# Altium PCB linkit-v4-0.1.PcbDoc (part 3 of 3)
Units mm, origin at the board's own origin, x right, y up, seen from the top; angles counter-clockwise.
Board outline 70 x 35 mm, 4 copper layers (Top Layer, Int1 (GND), Int2 (PWR), Bottom Layer), stack 1.369 mm thick; 193 components, 157 nets, 777 pads, 76 vias.
Unrouted connection lines stored in the file: 373.
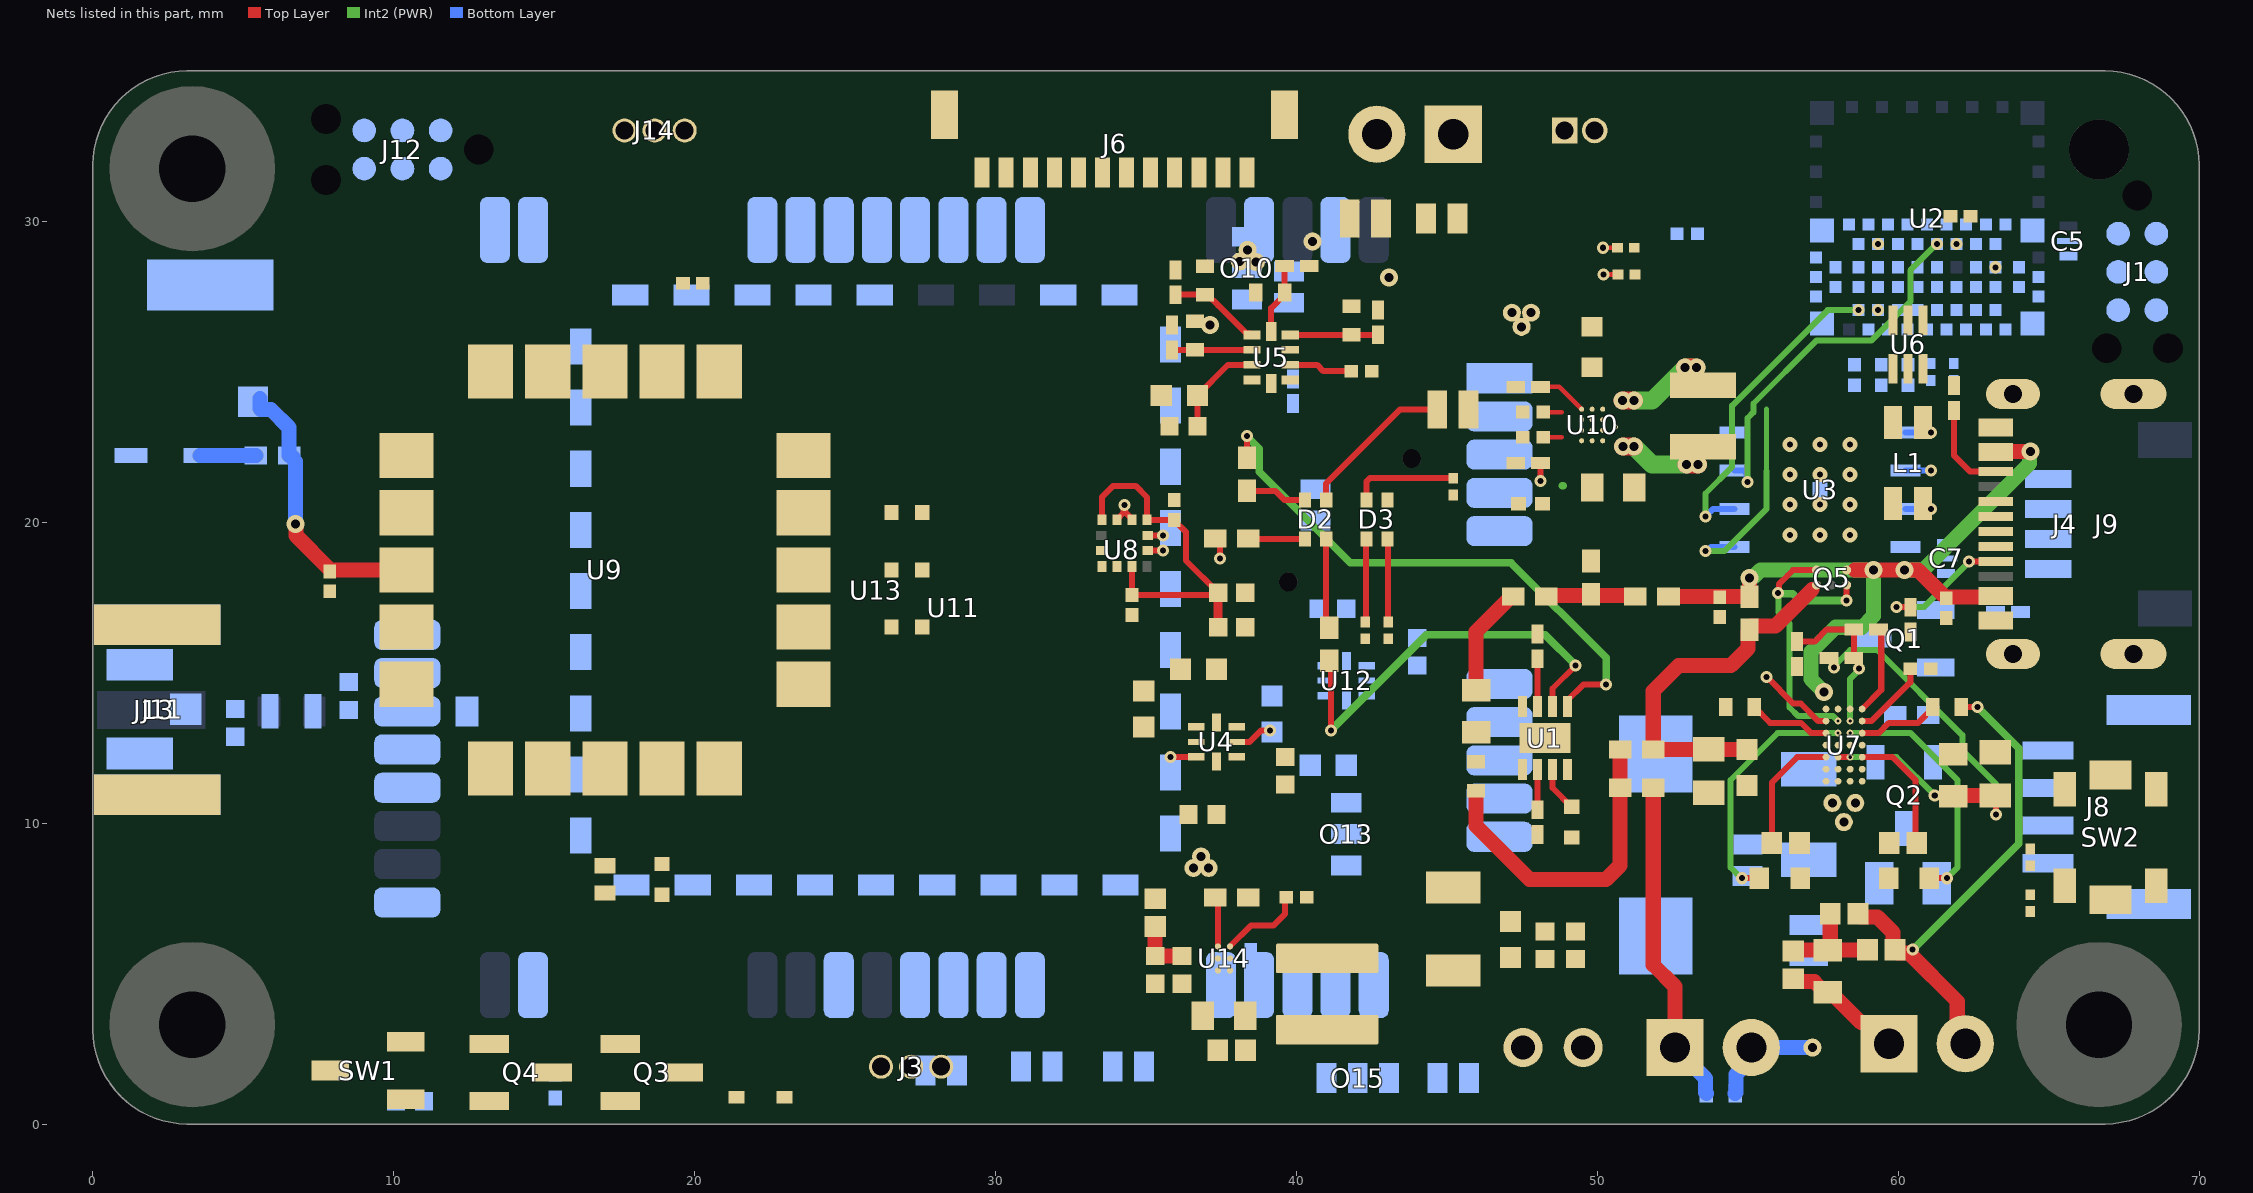
[diagram p3: the nets of this part, all layers, seen from the top]

## Part data (continued)
R50: "Thick Film Resistors - SMD 1/16watt 49.9Kohms 1%", Manufacturer_Name=Vishay, Mouser Part Number=71-CRCW0402-49.9K-E3, Arrow Part Number=CRCW040249K9FKED, Arrow Price/Stock=https://www.arrow.com/en/products/crcw040249k9fked/vishay?region=nac, Datasheet Link=http://www.vishay.com/docs/20035/dcrcwe3.pdf, Height=0.4mm, Manufacturer_Part_Number=CRCW040249K9FKED, Mouser Price/Stock=https://www.mouser.co.uk/ProductDetail/Vishay-Dale/CRCW040249K9FKED?qs=hAuyw6LW%252BLhwjtjsHx%2FGDQ%3D%3D
R52 R53 R54 R55 R56: "Thick Film Resistors - SMD CRCW 402 jumper", Manufacturer_Name=Vishay, Mouser Part Number=71-CRCW04020000Z0EEH, Arrow Part Number=CRCW04020000Z0EEHP, Arrow Price/Stock=https://www.arrow.com/en/products/crcw04020000z0eehp/vishay?utm_currency=USD&region=nac, Datasheet Link=http://www.vishay.com/docs/20035/dcrcwe3.pdf, Height=0.4mm, Manufacturer_Part_Number=CRCW04020000Z0EEHP, Mouser Price/Stock=https://www.mouser.co.uk/ProductDetail/Vishay-Dale/CRCW04020000Z0EEHP?qs=Imq1NPwxi74NTc567q7flQ%3D%3D
SW1: "Board Mount Hall Effect/Magnetic Sensors Integrated Digital Omnipolar, TMR, High Sensitivity Magnetic Switch, SOT23 Package, Ind Temp, 2Hz", Manufacturer_Name="Allegro MicroSystems", Mouser Part Number=462-CT8132BV-IS3, Datasheet Link=https://www.mouser.fr/datasheet/2/1115/Allegro_DS_CT813x_Datasheet_GS_FINAL_R2_v2-3441103.pdf, Height=1.4mm, Manufacturer_Part_Number=CT8132BV-IS3, Mouser Price/Stock=https://www.mouser.fr/ProductDetail/Allegro-MicroSystems/CT8132BV-IS3?qs=GBLSl2Akirsc7cUAudCqXg%3D%3D
SW2: "SW SPST PB 50MA 12V SMT CK variant", Manufacturer=C&K, Manufacturers Part Number="PTS820J2xM SMTR LFS", Supplier Part Number 1=611-PTS820J25MSMTR, Distributor 1=EBV, Distributor 2="Future Electronics", Supplier 1=Mouser, Supplier 2=Digi-Key, Supplier Part Number 2=CKN10505CT-ND
U1: "Battery Management 800-mA linear batter y charger for one-ce", Manufacturer_Name="Texas Instruments", Mouser Part Number=595-BQ25176MDSGR, Arrow Part Number=BQ25176MDSGR, Arrow Price/Stock=https://www.arrow.com/en/products/bq25176mdsgr/texas-instruments?region=nac, Datasheet Link=https://www.ti.com/lit/gpn/bq25176m, Height=0.8mm, Manufacturer_Part_Number=BQ25176MDSGR, Mouser Price/Stock=https://www.mouser.co.uk/ProductDetail/Texas-Instruments/BQ25176MDSGR?qs=Y0Uzf4wQF3nVhcdITj52nA%3D%3D
U2: "IC ISP Smart Bluetooth Module", Manufacturer=InsightSIP, Manufacturers Part Number=ISP1807-LR-ST, Temp Max=85, Temp Min=-40, Supplier 1=Rutronik, Supplier 2=Mouser, Supplier Part Number 1=ISP1807-LR-ST, Supplier Part Number 2=359-ISP1807-LR-ST, Supplier Unit Price 1=8.5
U3: "IC MEM SERIAL NOR FLASH QSPI 128Mb/16MB 3.6V 166MHz WSON8 6X5", Manufacturer=ISSI, Supplier Part Number 1=2901145, Temp Max=105, Temp Min=-40, Distributor 1=EBV, Distributor 2="Future Electronics", Manufacturers Part Number=IS25LP128F-JKLE, Supplier 1=Farnell, Supplier 2=Mouser, Supplier Part Number 2=870-IS25LP128FJKLETR
U4 U12: "Power Switch ICs - Power Distribution Low Input VTG Dual L oad Switch", Manufacturer_Name="Texas Instruments", Mouser Part Number=595-TPS22960RSER, Arrow Part Number=TPS22960RSER, Arrow Price/Stock=https://www.arrow.com/en/products/tps22960rser/texas-instruments?region=nac, Datasheet Link=https://www.ti.com/lit/ds/symlink/tps22960.pdf?ts=1638681846865&ref_url=https%253A%252F%252Fwww.google.com%252F, Height=0.6mm, Manufacturer_Part_Number=TPS22960RSER, Mouser Price/Stock=https://www.mouser.co.uk/ProductDetail/Texas-Instruments/TPS22960RSER?qs=EQxOuqCyzqQpKHLEcq5RSg%3D%3D
U5: "Analog to Digital Converters - ADC 16B ADC w/ Int MUX P GA Comp Osc & Ref A", Manufacturer_Name="Texas Instruments", Mouser Part Number=595-ADS1115IRUGR, Arrow Part Number=ADS1115IRUGR, Arrow Price/Stock=https://www.arrow.com/en/products/ads1115irugr/texas-instruments?utm_currency=USD&region=nac, Datasheet Link=https://www.ti.com/lit/ds/symlink/ads1115.pdf?ts=1601235703022&ref_url=https%253A%252F%252Fwww.ti.com%252Fproduct%252FADS1115%253FkeyMatch%253DADS1115IRUGR%2526tisearch%253DSearch-EN-everything%2526usecase%253DOPN, Height=0.4mm, Manufacturer_Part_Number=ADS1115IRUGR, Mouser Price/Stock=https://www.mouser.co.uk/ProductDetail/Texas-Instruments/ADS1115IRUGR?qs=IK5e5L0zOXhqw%2F8AHSSbuA%3D%3D
U6: "ESD Suppressors / TVS Diodes High Speed Interface Protection Low Cap", Manufacturer_Name=STMicroelectronics, Datasheet Link=https://datasheet.lcsc.com/szlcsc/STMicroelectronics-USBLC6-2P6_C15999.pdf, Height=0.6mm, Manufacturer_Part_Number=USBLC62P6
U7: "Wireless Charging ICs Wireless Pwr Receivr A 595-BQ51003YFPR", Manufacturer_Name="Texas Instruments", Mouser Part Number=595-BQ51003YFPT, Arrow Part Number=BQ51003YFPT, Arrow Price/Stock=https://www.arrow.com/en/products/bq51003yfpt/texas-instruments?region=nac, Datasheet Link=http://www.ti.com/lit/gpn/BQ51003, Height=0.5mm, Manufacturer_Part_Number=BQ51003YFPT, Mouser Price/Stock=https://www.mouser.co.uk/ProductDetail/Texas-Instruments/BQ51003YFPT?qs=QCUnHQQYO1rX6GZ4rUhwCg%3D%3D
U8: "IC AXL Accel/temp SPI/I2C 12LGA", Manufacturer="Bosch Sensortec", Supplier Part Number 1=828-1081-1-ND, Temp Max=85, Temp Min=-40, Manufacturers Part Number=BMA400, Supplier 1=Digi-Key, Supplier 2=Mouser, Supplier Part Number 2=262-BMA400
U9: "GNSS / GPS Modules u-blox M10 GNSS antenna module ROM, TCXO, SAW, LNA LGA, 16x16 mm", Manufacturer_Name=U-Blox, Mouser Part Number=377-SAM-M10Q-00B, Datasheet Link=https://content.u-blox.com/sites/default/files/documents/SAM-M10Q_DataSheet_UBX-22013293.pdf, Height=6.8mm, Manufacturer_Part_Number=SAM-M10Q-00B, Mouser Price/Stock=https://www.mouser.co.uk/ProductDetail/u-blox/SAM-M10Q-00B?qs=vvQtp7zwQdOaA6LplTUKjg%3D%3D
U10: "Switching Voltage Regulators 5.5-V buck-boost con verter with 75-nA op", Manufacturer_Name="Texas Instruments", Mouser Part Number=595-TPS63901YCJR, Arrow Part Number=TPS63901YCJR, Arrow Price/Stock=https://www.arrow.com/en/products/tps63901ycjr/texas-instruments?region=nac, Datasheet Link=https://www.ti.com/lit/ds/symlink/tps63901.pdf?ts=1658737279065&ref_url=https%253A%252F%252Fwww.ti.com%252Fproduct%252FTPS63901%253FkeyMatch%253DTPS63901YCJR%2526tisearch%253Dsearch-everything%2526usecase%253DOPN, Height=0.35mm, Manufacturer_Part_Number=TPS63901YCJR, Mouser Price/Stock=https://www.mouser.co.uk/ProductDetail/Texas-Instruments/TPS63901YCJR?qs=vvQtp7zwQdNZy3FE2e2hqg%3D%3D
U11: "KIM2 Module 48 pins 1.27mm pitch 36.6 x 25.4 x 5mm", Manufacturer=Kineis, Rating=3.3-5V, Tolerance="-30 /  +55°C", BOI="SMD48 36.6x25.4x5mm", DESIG="KIMFLEX Module 48 pins 1.27mm pitch 36.6 x 25.4 x 5mm", K P/N=-, Manufacturer P/N=KIM2, Supplier=Kineis, Supplier P/N=KIMFLEX, VAL=KIM2
U13: "Arribada SMD module Argos comunication with PA GR5504"
U14: "Switching Voltage Regulators 95-nA low IQ 5.5-V b oost converter with INLIMIT (1.9A)", Manufacturer_Name="Texas Instruments", Mouser Part Number=595-TPS612997YBHR, Arrow Part Number=TPS612997YBHR, Arrow Price/Stock=https://www.arrow.com/en/products/tps612997ybhr/texas-instruments?utm_currency=USD&region=nac, Datasheet Link=https://www.ti.com/lit/gpn/tps61299, Height=0.4mm, Manufacturer_Part_Number=TPS612997YBHR, Mouser Price/Stock=https://www.mouser.co.uk/ProductDetail/Texas-Instruments/TPS612997YBHR?qs=mELouGlnn3dLhnQxUdz5hw%3D%3D

## Via types
v1: diameter 0.4, hole 0.2, Top Layer to Int2 (PWR), 28 vias
v2: diameter 0.6, hole 0.3, Top Layer to Int2 (PWR), 16 vias
v3: diameter 0.5, hole 0.2, Top Layer to Bottom Layer, 12 vias
v4: diameter 0.4, hole 0.2, Top Layer to Bottom Layer, 7 vias
v5: diameter 0.4, hole 0.2, Int2 (PWR) to Bottom Layer, 6 vias
v6: diameter 0.226, hole 0.11, Top Layer to Int2 (PWR), 5 vias
v7: diameter 0.169, hole 0.1, Top Layer to Int2 (PWR), 1 vias
v8: diameter 0.6, hole 0.3, Top Layer to Bottom Layer, 1 vias

## Nets (pads, with @x,y where several pads share a name; then routed paths per layer and width w, separated by ;. In a path a pad name is that pad's centre, name@x,y a point inside that pad or via, vN(x,y) a via of type N, cw(c..) or ccw(c..) an arc to the next point about the centre after c; other vN are vias at no path point)
ADC0: O7.2 R27.1
ADC1: O8.2 R30.1
ADC2: J6.5 R32.1
ADC3: J6.12 R51.1
ADC_ALERT_RDY: R28.2 U2.64 U5.2 | length 2.1
  Top Layer w0.2: U5.2@39.797,25.228 40.685,25.228 40.894,25.019 R28.2@41.824,25.019
AGND: C14.2 C15.2 C16.2 C57.2 V?1.1 V?2.1 V?3.1 | length 0.6
  Top Layer w0.2: C57.2@36.626,26.678 36.687,26.617 37.071,26.617 v2(37.132,26.556)
  other v2: 43.076,28.133 40.529,29.337
BAT_AN: C4.2 O5.1 U2.38
BAT_READ_EN: R3.2 R22.2 U2.9
BMA_PWR: C37.2 C38.2 R29.1 R31.2 U8.3 U8.7 U8.10 | length 12.2
  Top Layer w0.2: U8.10@33.54,20.079 33.54,20.843 33.906,21.209 34.654,21.209 35.04,20.823 U8.7@35.04,20.079 C37.2@35.941,20.079 35.941,20.059 36.322,19.678 36.322,18.727 R29.1@37.396,17.653 37.325,17.582 C38.2@34.537,17.582 34.54,17.586 U8.3@34.54,18.529
  Top Layer w0.3: R31.2@37.396,16.51 R29.1@37.396,17.653
BOOT1: C29.2 U7.C4 | length 4.2
  Top Layer w0.2: C29.2@55.798,9.328 55.798,11.348 56.642,12.192 U7.C4@57.601,12.192
BOOT2: C34.2 U7.C1 | length 4.2
  Top Layer w0.2: U7.C1@58.801,12.192 59.817,12.192 60.582,11.427 C34.2@60.582,9.328
CLAMP1: C23.2 U7.E3 | length 8.2
  Top Layer w0.2: v1(54.802,8.168) C23.2@55.388,8.168
  Int2 (PWR) w0.2: v1@54.786,8.168 54.426,8.529 54.426,11.43 55.988,12.992 v6(58.001,12.992)
CLAMP2: C36.2 U7.E2 | length 8.2
  Top Layer w0.2: C36.2@61.029,8.168 v1(61.616,8.168)
  Int2 (PWR) w0.2: v6(58.401,12.992) 60.414,12.992 61.976,11.43 61.976,8.529 v1(61.616,8.168)
COIL-1: C24.1 C28.1 J7.1 | length 4.1
  Top Layer w0.5: C24.1@56.515,4.826 56.61,4.731 57.212,4.731 57.563,4.38 C28.1@57.658,4.38 57.753,4.38 58.766,3.367 58.99,3.367 J7.1@59.69,2.667
COIL-2: C5.1@59.896,5.795 C32.1 C34.1 C35.1 C36.1 J7.2 U7.B1 U7.B2 | length 17
  Top Layer w0.2: C35.1@62.09,13.862 v1(62.631,13.862)
  Top Layer w0.5: C32.1@58.661,6.987 58.661,6.972 58.756,6.877 59.312,6.877 59.825,6.364 59.825,5.866 C5.1@59.896,5.795 59.896,5.78 59.991,5.685 60.355,5.685 61.962,4.078 61.962,2.935 J7.2@62.23,2.667
  Int2 (PWR) w0.254: v1(60.482,5.795) 64.008,9.321 64.008,12.485 v1(62.631,13.862)
COMM1: C25.2 U7.E4 | length 2.7
  Top Layer w0.2: C25.2@55.212,13.862 55.739,13.335 56.769,13.335 57.112,12.992 U7.E4@57.601,12.992
COMM2: C35.2 U7.E1 | length 2.7
  Top Layer w0.2: U7.E1@58.801,12.992 59.347,12.992 59.69,13.335 60.663,13.335 C35.2@61.19,13.862
DCDC_3V3: D3.1 R29.2
GND: BT1.- C1.2 C2.1 C3.1 C4.1 C5.3 C6.1 C7.3 C8.2 C9.1 C10.2 C11.1 C12.1 C13.2 C17.1 C18.1 C19.1 C20.2 C21.2 C22.2 C26.2 C27.2 C30.2 C31.2 C37.1 C38.1 C39.2 C40.1 C43.1 C44.2 C45.2 C46.1 C47.1 C49.1 C58.2 J1.5 J2.1 J3.1 J4.A1_B12 J4.B1_A12 J4.SHIELD J5.2 J6.2 J6.4 J6.6 J6.13 J6.14 J8.4 J8.MP1 J8.MP2 J9.1 J11.1 J11.2 J12.5 J13.2 J14.1 O11.1 Q1.2 R6.2 R7.1 R8.1 R10.1 R11.1 R12.1 R18.1 R19.1 R20.1 R21.1 R22.1 R26.1 R33.1 R34.1 R37.2 R39.2 SW1.3 SW2.1 SW2.G1 SW2.G2 SW2.G3 SW2.G4 U1.4 U1.9 U2.1 U2.7 U2.14 U2.16 U2.18 U2.21 U2.23 U2.24 U2.25 U2.31 U3.4 U3.9 U4.3 U4.6 U5.1 U5.3 U6.2 U7.G2 U7.G3 U8.1 U8.8 U8.9 U9.1 U9.4 U9.5 U9.6 U9.10 U9.11 U9.15 U9.16 U9.20 U11.1@46.749,24.786 U11.3@46.749,22.246 U11.7@46.749,13.356 U11.10@46.749,9.546 U11.13@40.029,4.616 U11.14@38.759,4.616 U11.21@24.789,4.616 U11.24@14.629,4.616 U11.26@10.449,7.366 U11.29@10.449,11.176 U11.30@10.449,12.446 U11.32@10.449,14.986 U11.33@10.449,16.256 U11.34@13.359,29.716 U11.35@14.629,29.716 U11.36@22.249,29.716 U11.39@26.059,29.716 U11.42@29.869,29.716 U11.43@31.139,29.716 U11.45@38.759,29.716 U11.47@41.299,29.716 U12.3 U12.6 U13.6 U13.13 U13.14 U13.15 U13.16 U13.17 U13.19 U13.20 U13.21 U13.29 V1.2 V2.2 V3.2 V4.2 V5.2 V6.2 V7.2 V8.2 V9.2 V10.2 V?1.2 V?2.2 V?3.2 | length 0.9
  Top Layer w0.2: U8.9@34.04,20.079 34.04,20.104 34.252,20.316 34.252,20.536 v1(34.29,20.574) ; 34.328,20.316 34.54,20.104 U8.8@34.54,20.079
  other v3: 56.404,19.582 57.404,19.582 58.404,19.582 56.404,20.582 57.404,20.582 58.404,20.582 56.404,21.582 57.404,21.582 58.404,21.582 56.404,22.582 57.404,22.582 58.404,22.582
GPIO: J6.11 U2.15
GPS_INT: U2.61 U9.19
GPS_NRST: U2.53 U9.18
GPS_PPS: U2.46 U9.7
GPS_PWR_EN: R21.2 U2.50 U4.7 | length 0.9
  Top Layer w0.2: v1(35.814,12.192) 35.818,12.196 36.659,12.196 U4.7@36.663,12.2
GPS_UART_RX: J3.2 R40.2 U2.56
GPS_UART_TX: J3.3 R42.2 U2.55
I2C_SCL: J8.2 J9.4 R1.1 R43.2 U2.37 U5.10 U8.12
I2C_SDA: J8.3 J9.3 R2.1 R44.1 U2.39 U5.9 U8.2
IMU_PWR: R18.2 R31.1 U2.41
INT1_IMU: U2.49 U8.5 | length 0.5
  Top Layer w0.2: U8.5@35.065,19.054 v1(35.56,19.054)
INT2_IMU: U2.29 U8.6 | length 0.5
  Top Layer w0.2: U8.6@35.065,19.554 v1(35.56,19.554)
KIM_I2C_SCL: U11.41@28.599,29.716
KIM_I2C_SDA: U11.40@27.329,29.716
KIM_PWR_ON: O12.2 U2.2
KIM_RX: U11.19@27.329,4.616
KIM_TX: O3.1 U11.18@28.599,4.616 U13.22
LED_B: R24.1 U2.63
LED_G: R25.1 U2.60
LED_R: R23.1 U2.62
LX1: L2.1 U10.A1 | length 2.7
  Top Layer w0.6: v2(50.85,22.518) v2(51.225,22.518) ; v2(52.965,21.922) v2(53.34,21.922)
  Int2 (PWR) w0.6: v2(51.225,22.518) 51.821,21.922 v2(52.965,21.922)
LX2: L2.2 U10.D1 | length 3.3
  Top Layer w0.6: v2(50.844,24.042) v2(51.225,24.042) ; v2(52.92,25.146) v2(53.295,25.146)
  Int2 (PWR) w0.6: v2(51.225,24.042) 51.824,24.042 52.928,25.146 v2(53.295,25.146)
NetBT1_+: BT1.+ C40.2 R41.1 U9.3 | length 9.3
  Top Layer w0.5: v8(6.731,19.939) 6.75,19.92 6.75,19.558 C40.2@7.874,18.434 ; C40.2@7.925,18.415 U9.3@10.418,18.415
  Bottom Layer w0.5: BT1.+@5.555,24.112 5.555,23.772 5.574,23.753 5.914,23.753 6.519,23.147 R41.1@6.519,22.225 ; R41.1@6.594,22.225 6.644,22.175 6.644,22.1 6.731,22.013 v8(6.731,19.939)
NetC2_2: C2.2 R53.1 U1.8 | length 3.7
  Top Layer w0.2: R53.1@47.127,17.526 R53.1@47.202,17.526
  Top Layer w0.5: C2.2@45.974,14.416 45.974,16.373 R53.1@47.127,17.526
NetC5_2: C5.2@65.659,29.845 U2.26 | length 10.2
  Top Layer w0.2: v1(53.721,13.862) 54.262,13.862
  Top Layer w0.3: v1(55.929,5.746) 56.515,5.746
  Int2 (PWR) w0.254: v1(53.721,13.862) 53.721,7.954 v1(55.929,5.746)
NetC5_2: C5.2@58.976,5.795 C23.1 C24.2 C25.1 C28.2 C29.1 C32.2 U7.B3 U7.B4 | length 3.6
  Top Layer w0.2: C24.2@56.515,5.746 C24.2@56.549,5.78 ; C5.2@58.911,5.78 C5.2@58.976,5.715
  Top Layer w0.5: C24.2@56.549,5.78 C28.2@57.658,5.78 C5.2@58.911,5.78 ; C28.2@57.741,5.863 C32.2@57.741,6.987
NetC7_2: C7.2 U3.8
NetC14_1: C14.1 R27.2 U5.4 | length 2.9
  Top Layer w0.2: U5.4@39.797,26.228 R27.2@42.718,26.228
NetC15_1: C15.1 R30.2 U5.5 | length 2.5
  Top Layer w0.2: U5.5@39.159,26.338 39.159,27.113 39.604,27.558 C15.1@39.604,27.633 39.604,28.422 39.539,28.422 R30.2@39.639,28.522
NetC16_1: C16.1 R32.2 U5.6 | length 3.1
  Top Layer w0.2: R32.2@35.987,27.563 37.042,27.563 37.395,27.21 37.403,27.21 37.868,26.744 38.334,26.278 38.471,26.278 U5.6@38.521,26.228
NetC30_1: C30.1 C31.1 R36.1 U7.C2 U7.C3 | length 15.7
  Top Layer w0.2: R36.1@57.697,15.494 57.768,15.494 57.868,15.394 v1(57.868,15.173) ; U7.C3@58.001,12.192 v6(58.401,12.192) ; v1(61.214,10.922) 61.794,10.922 C31.1@61.83,10.886 C31.1@61.86,10.916 ; v1(63.246,10.287) C30.1@63.246,10.897
  Top Layer w0.5: C31.1@61.86,10.916 C30.1@63.227,10.916 C30.1@63.246,10.897
  Int2 (PWR) w0.2: v1(57.868,15.173) 57.868,15.22 58.402,15.754 59.303,15.754 62.133,12.924 62.133,12.416 63.246,11.303 v1(63.246,10.287) ; v6(58.401,12.192) 59.944,12.192 v1(61.214,10.922)
NetC49_2: C49.2 J11.3 L3.1@5.889,13.716
NetC57_1: C57.1 R51.2 U5.7 | length 2.8
  Top Layer w0.2: R51.2@35.864,25.728 C57.1@36.626,25.728 U5.7@38.521,25.728 U5.7@38.519,25.73 ; C57.1@36.626,25.827 C57.1@36.723,25.73
NetC58_1: C58.1 R54.2 R56.2 U1.1 | length 10.7
  Top Layer w0.5: C58.1@45.974,10.993 45.974,9.906 47.752,8.128 50.292,8.128 50.758,8.594 R54.2@50.758,11.176 R56.2@50.758,12.446
NetD2_1: D2.1 O9.2 | length 5.3
  Top Layer w0.2: D2.1@40.99,20.742 40.99,21.292 43.447,23.749 O9.2@44.679,23.749
NetD2_2: D2.2 R13.1 | length 2.1
  Top Layer w0.2: R13.1@38.354,21.04 39.298,21.04 39.596,20.742 D2.2@40.29,20.742
NetD2_3: D2.3 R14.2 | length 1.9
  Top Layer w0.2: R14.2@38.396,19.457 38.411,19.442 D2.3@40.29,19.442
NetD2_4: D2.4 R15.1 | length 3
  Top Layer w0.2: D2.4@40.99,19.442 40.99,16.652 R15.1@41.148,16.494
NetD3_2: D3.2 R23.2 | length 3.5
  Top Layer w0.2: D3.2@42.322,20.742 42.322,21.346 42.439,21.463 R23.2@45.212,21.463
NetD3_3: D3.3 R24.2 | length 2.8
  Top Layer w0.2: R24.2@42.291,16.689 42.306,16.705 42.306,19.427 D3.3@42.322,19.442
NetD3_4: D3.4 R25.2 | length 2.8
  Top Layer w0.2: D3.4@43.022,19.442 43.038,19.427 43.038,16.705 R25.2@43.053,16.689
NetD4_1: D4.1 R41.2 | length 1.9
  Bottom Layer w0.5: D4.1@3.563,22.225 R41.2@5.419,22.225
NetJ4_A5: J4.A5 R34.2 | length 4.4
  Top Layer w0.2: v1(59.944,17.176) R34.2@60.401,17.176 ; v1(62.357,18.691) J4.A5@63.243,18.691
  Int2 (PWR) w0.2: v1(59.944,17.176) 60.842,17.176 v1(62.357,18.691)
NetJ4_B5: J4.B5 R33.2 | length 3.1
  Top Layer w0.2: R33.2@61.849,23.718 61.849,22.225 62.383,21.691 J4.B5@63.243,21.691
NetJ12_1: J12.1 O15.1
NetL5_2: L5.2 U14.B1
NetO10_1: O10.1 R48.2
NetO12_1: O12.1 U11.15@37.489,4.616
NetO13_1: O13.1 U13.30
NetQ1_1: Q1.1 R3.1
NetQ1_3: Q1.3 Q2.1 R4.2
NetQ2_3: Q2.3 R5.1
NetQ3_1: Q3.1 Q4.1 SW1.2
NetQ5_A2: Q5.A2 Q5.C1 U7.F3 | length 10.4
  Top Layer w0.2: v1(56.007,17.653) 56.034,17.68 56.034,17.934 56.328,18.228 56.511,18.411 Q5.C1@57.285,18.411 ; v1(58.285,17.399) Q5.A2@58.285,17.911
  Int2 (PWR) w0.2: v1@56.021,17.639 56.021,17.004 56.388,16.637 56.388,13.843 56.678,13.553 57.84,13.553 v6(58.001,13.392)
  Int2 (PWR) w0.254: v1(56.007,17.653) 56.021,17.639 56.035,17.625 56.489,17.625 56.715,17.399 v1(58.285,17.399)
NetR10_2: R10.2 U1.3 | length 1.5
  Top Layer w0.2: U1.3@48.51,11.777 48.51,11.172 49.137,10.546 R10.2@49.149,10.546
NetR11_2: R11.2 U1.2 | length 1.3
  Top Layer w0.2: R11.2@48.01,10.445 U1.2@48.01,11.777
NetR12_2: R12.2 U1.7 | length 1.6
  Top Layer w0.2: R12.2@48.006,15.463 48.008,15.461 48.008,13.879 U1.7@48.01,13.877
NetR17_1: R17.1 U2.20
NetR17_2: R17.2 U2.22
NetR36_2: R36.2 R38.1 R39.1 U7.F2 | length 5.3
  Top Layer w0.2: R39.1@56.642,16.033 57.223,16.033 57.63,16.44 R38.1@58.525,16.44 58.525,15.498 R36.2@58.521,15.494 58.591,15.494 58.691,15.394 v1(58.691,15.136)
  Int2 (PWR) w0.2: v6(58.401,13.392) 58.401,14.792 58.691,15.082 v1(58.691,15.136)
NetR37_1: R37.1 U7.F1 | length 2.6
  Top Layer w0.2: U7.F1@58.801,13.392 58.806,13.397 59.117,13.397 60.401,14.681 R37.1@60.401,15.132
NetR38_2: R38.2 U7.G1 | length 2.9
  Top Layer w0.2: U7.G1@58.801,13.792 59.436,14.427 59.436,16.353 R38.2@59.349,16.44
NetR40_1: R40.1 U9.14
NetR42_1: R42.1 U9.13
NetR43_1: R43.1 U9.12
NetR44_2: R44.2 U9.9
NetR45_1: R45.1 U10.B2 | length 0.6
  Top Layer w0.2: v1(48.112,21.375) R45.1@48.112,21.962
  Int2 (PWR) w0.254: 48.83,21.209 48.864,21.209
  other v7: 50.601,23.166
NetR46_1: R46.1 U10.C3 | length 2.3
  Top Layer w0.15: 48.112,24.502 48.733,24.502 49.478,23.757 ; R46.1@48.205,23.665 48.209,23.661 48.812,23.661
NetR47_2: R47.2 U10.D3
NetR50_1: R50.1 U14.C2 | length 1.7
  Top Layer w0.2: R50.1@37.296,7.535 37.392,7.439 U14.C2@37.392,5.903
NetR52_1: R52.1 R53.2 R55.1 | length 3
  Top Layer w0.254: R53.2@48.302,17.526 R53.2@48.344,17.569 ; R55.1@49.741,17.569 R55.1@49.784,17.611 R55.1@49.827,17.569 ; R52.1@51.224,17.569 R52.1@51.266,17.526
  Top Layer w0.5: R53.2@48.344,17.569 R55.1@49.741,17.569 ; R55.1@49.827,17.569 R52.1@51.224,17.569
NPG_LED: R15.2 U1.6 | length 13.9
  Top Layer w0.2: R15.2@41.09,15.394 41.148,15.336 v1(41.148,13.081) ; U1.6@48.51,13.877 48.51,14.474 v1(49.276,15.24)
  Int2 (PWR) w0.254: v1(41.148,13.081) 44.323,16.256 48.26,16.256 v1(49.276,15.24)
nRESET: C6.2 J1.3 R16.1 SW2.2 U2.13
nRESET-SAT: J12.3 O11.2 R48.1 U2.42 U11.2@46.749,23.516 U13.35
NRF_DBG: J1.6 J2.2 U2.43
PGND1: C41.2 C42.2 R45.2 R46.2 R47.1 U10.B1 U10.C1 V1.1 V2.1 V3.1
PGND2: C50.2 C51.2 C52.1 C53.1 C54.1 C55.1 R50.2 U14.A2 V4.1 V5.1 V6.1
PGND3: U7.A1 U7.A2 U7.A3 U7.A4 V8.1 V9.1 V10.1
POWER_CONTROL: D1.2 U2.35
QSPI_CLK: U2.45 U3.6 | length 0.8
  Bottom Layer w0.2: U3.6@60.244,21.717 v5(61.087,21.717)
  other v4: 59.335,27.049
QSPI_CS: U2.19 U3.1 | length 6.9
  Int2 (PWR) w0.174: 55.626,21.695 55.626,23.763
  Int2 (PWR) w0.2: v5(53.594,19.05) 54.229,19.05 55.626,20.447 55.626,21.695
  Bottom Layer w0.2: v5(53.594,19.05) 53.648,19.05 53.775,19.177 U3.1@54.564,19.177
  other v4: 61.935,29.249
QSPI_IO0: U2.11 U3.5 | length 0.8
  Bottom Layer w0.2: U3.5@60.244,22.987 v5(61.087,22.987)
  other v4: 59.335,29.249
QSPI_IO1: U2.47 U3.2 | length 10.6
  Int2 (PWR) w0.2: v5(53.594,20.193) 53.594,20.955 54.483,21.844 54.483,23.876 57.658,27.051 v4(58.674,27.051)
  Bottom Layer w0.2: v5(53.594,20.193) 53.848,20.447 U3.2@54.564,20.447
QSPI_IO2: U2.17 U3.3 | length 12.3
  Int2 (PWR) w0.193: 55.185,23.653 55.189,23.656 55.189,23.945 57.276,26.032 57.282,26.032
  Int2 (PWR) w0.2: v5(54.991,21.336) 54.991,23.459 55.185,23.653 ; 57.282,26.032 57.284,26.035 59.105,26.035 60.406,27.336 60.406,28.369 v4(61.285,29.249)
  Bottom Layer w0.2: U3.3@54.564,21.717 54.864,21.717 54.964,21.617 54.964,21.363 v5(54.991,21.336)
QSPI_IO3: U2.57 U3.7 | length 0.8
  Bottom Layer w0.2: U3.7@60.244,20.447 v5(61.087,20.447)
  other v4: 63.235,28.474
REED_MCU: Q4.3 R7.2 U2.58
RX-OUT: C26.1 C27.1 Q5.C2 R35.2 R56.1 U7.D1 U7.D2 U7.D3 U7.D4 | length 12.3
  Top Layer w0.194: 57.132,17.758 Q5.C2@57.285,17.911
  Top Layer w0.5: C27.1@54.972,12.446 54.969,12.449 53.705,12.449 C26.1@53.702,12.452 53.699,12.449 51.861,12.449 R56.1@51.858,12.446 51.858,14.393 52.705,15.24 54.444,15.24 55.011,15.807 55.011,16.376 R35.2@55.061,16.426 55.061,16.501 55.111,16.551 55.925,16.551 57.132,17.758
SAFE: R26.2 U9.8
SAT_ANTENNA: C47.2 L3.2@7.319,13.716 L4.1 U11.31@10.449,13.716
SAT_EN: O12.3 O14.2 R20.2 U2.51 U12.2 U14.C1 | length 2.8
  Top Layer w0.2: U14.C1@37.792,5.903 38.493,6.604 39.243,6.604 39.624,6.985 39.624,7.494 R20.2@39.665,7.535
SAT_INT: U2.54 U11.5@46.749,19.706 U13.1
SAT_SPI_MISO: O4.1 U11.17@29.869,4.616 U13.2
SAT_SPI_NSS: O1.1 U11.4@46.749,20.976 U13.24
SAT_SPI_SCK: O2.1 U11.16@31.139,4.616 U13.3
SAT_SWCLK: J12.4 U11.8@46.749,12.086 U13.25
SAT_SWDIO: J12.2 U11.9@46.749,10.816 U13.26
SAT_SWO: J12.6 U13.23
SAT_UART_RX: J14.2 U2.6 U11.38@24.789,29.716 U13.5
SAT_UART_TX: J14.3 U2.5 U11.37@23.519,29.716 U13.4
SAT_WKUP: R19.2 U2.44 U11.6@46.749,14.626 U13.0
SLOW_SWS_SEND: J10.1 U2.4
SMD_ANT: L4.2 U13.18
SMD_RF_BUSY: U13.27
SMD_RF_NRST: U13.28
SMD_SCL: U13.33
SMD_SDA: U13.34
SMD_VPA_GOOD: U13.10
SPI_CLK: J6.8 O2.2 U2.32
SPI_MISO: J6.9 O4.2 U2.33
SPI_MOSI: J6.7 O3.2 U2.34
SPI_NSS: J6.10 O1.2 U2.36
SPV+: C56.1 J15.1 R54.1 | length 10.9
  Top Layer w0.5: R54.1@51.858,11.176 51.858,5.292 52.578,4.572 J15.1@52.578,2.54
  Bottom Layer w0.5: J15.1@52.578,2.54 53.602,1.516 53.602,1.041 C56.1@53.627,1.016
SPV-: C56.2 J15.2 V7.1 | length 3.8
  Bottom Layer w0.5: C56.2@54.577,1.016 54.602,1.041 54.602,1.645 55.118,2.161 J15.2@55.118,2.54 V7.1@57.15,2.54
STAT_LED: R13.2 U1.5 U2.27 | length 18.7
  Top Layer w0.2: R13.2@38.354,22.14 v1(38.354,22.86) ; U1.5@49.01,13.877 49.01,14.077 49.538,14.605 v1(50.292,14.605)
  Int2 (PWR) w0.254: v1(38.354,22.86) 38.768,22.446 38.768,21.684 41.795,18.657 47.129,18.657 50.292,15.494 v1(50.292,14.605)
SWDCLK: J1.4 U2.30
SWDIO: J1.2 U2.28
SWS: C3.2 O6.2 U2.40
SWS_IN: J10.2 O6.1 O8.1
USB_D_N: U2.10 U6.4
USB_D_P: U2.8 U6.6
USB_L_N: L1.3 U6.1
USB_L_P: L1.2 U6.3
USB_N: J4.A7 J4.B7 L1.4
USB_P: J4.A6 J4.B6 L1.1
VADC_EN: U2.3 U4.2 | length 1.3
  Top Layer w0.2: U4.2@38.013,12.7 U4.2@38.247,12.7 ; U4.2@38.247,12.701 38.444,12.701 38.817,13.073 39.108,13.073 v1(39.116,13.081)
VBAT: C1.1 C19.2 C20.1 C21.1 C22.1 C41.1 C50.1 C51.1 C52.2 J5.1 J6.3 L5.1 O9.1 Q2.2 Q3.2 R4.1 R9.1 R55.2 SW1.1 U10.A2 U14.A1
VBAT_SENSE: O5.2 O7.1 R5.2 R6.1
VBUS: C17.2 C18.2 J4.A4_B9 J4.B4_A9 Q5.A1 R35.1 R52.2 U2.12 U6.5 U7.G4 | length 25.5
  Top Layer w0.254: C17.2@61.492,17.578 61.512,17.578 61.595,17.495 C17.2@61.595,17.475 C17.2@61.628,17.508 ; J4.A4_B9@63.21,17.508 J4.A4_B9@63.243,17.541 ; J4.B4_A9@63.222,22.32 J4.B4_A9@63.243,22.341
  Top Layer w0.5: R52.2@52.366,17.526 R35.1@55.061,17.526 v2(55.061,18.149) ; 58.547,18.411 59.178,18.411 v2(59.182,18.415) 60.655,18.415 C17.2@61.492,17.578 ; C17.2@61.628,17.508 J4.A4_B9@63.21,17.508 ; J4.B4_A9@63.222,22.32 63.254,22.352 63.26,22.346 64.383,22.346 v2(64.389,22.352)
  Int2 (PWR) w0.5: v2@55.155,18.149 55.42,18.415 v2(59.182,18.415) 59.182,16.891 58.801,16.51 57.912,16.51 57.097,15.695 57.097,14.785 v2(57.531,14.351) ; v2(60.202,18.419) 60.837,18.419 64.37,21.952 64.37,22.333 v2(64.389,22.352)
VCC_SEL: R9.2 U2.52 U10.B3 | length 0.6
  Top Layer w0.15: R9.2@48.205,22.819 48.824,22.819
VPA_EN: U12.7 U13.9
VSAT: C53.2 C54.2 C55.2 O10.2 O15.2 R49.1 U11.11@42.569,4.616 U11.12@41.299,4.616 U14.B2 | length 1.9
  Top Layer w0.5: C53.2@35.306,6.567 C55.2@35.306,5.582 C54.2@36.195,5.582
VSENS_1: C8.1 C12.2 C13.1 R28.1 U4.4 U5.8 | length 3.3
  Top Layer w0.2: C12.2@36.705,23.191 C13.1@36.705,24.207 37.726,25.228 U5.8@38.521,25.228
VSENS_2: C10.1 C39.1 D4.2 U4.5 U9.2 U9.17
VSYS: C5.1@65.659,28.845 C7.1 C9.2 C11.2 C42.1 C43.2 C46.2 J1.1 J6.1 J8.1 J9.2 O10.3 O13.2 O14.1 O15.3 Q4.2 R1.2 R2.2 R16.2 U4.1 U4.8 U10.C2 U10.D2 U12.1 U12.8 | length 1
  Top Layer w0.15: v1(50.183,29.122) R2.2@50.665,29.122 ; v1(50.209,28.233) R1.2@50.691,28.233
VSYS_EN: D1.1 Q3.3 R8.2 U10.A3
VSYS_SMD: C44.1 O13.3 R49.2 U12.4 U13.31 U13.32
VSYS_VPA: C45.1 U12.5 U13.7 U13.8
WIRELESS_NCHG_LED: R14.1 U7.F4 | length 3.3
  Top Layer w0.2: R14.1@37.296,19.457 37.465,19.288 v1(37.465,18.796) ; v1(55.626,14.859) 56.515,13.97 56.769,13.97 57.347,13.392 U7.F4@57.601,13.392
pads on no net: J1.H1 J1.H2 J1.H3 J4.A8 J4.B8 J9.S1 J9.S2 J12.H1 J12.H2 J12.H3 J13.1 L3.1@7.354,13.716 L3.2@5.854,13.716 MEC1.1 MEC1.2 MH1.0 MH2.1 MH3.1 MH4.1 Q5.B1 Q5.B2 U2.48 U2.59 U2.65 U2.66 U2.67 U2.68 U2.69 U2.70 U2.71 U2.72 U2.73 U2.74 U2.75 U2.76 U2.77 U2.78 U8. U8.4 U8.11 U11.1@46.149,24.786 U11.2@46.149,23.516 U11.3@46.149,22.246 U11.4@46.149,20.976 U11.5@46.149,19.706 U11.6@46.149,14.626 U11.7@46.149,13.356 U11.8@46.149,12.086 U11.9@46.149,10.816 U11.10@46.149,9.546 U11.11@42.569,5.216 U11.12@41.299,5.216 U11.13@40.029,5.216 U11.14@38.759,5.216 U11.15@37.489,5.216 U11.16@31.138,5.216 U11.17@29.869,5.216 U11.18@28.599,5.216 U11.19@27.328,5.216 U11.20 U11.21@24.789,5.216 U11.22 U11.23 U11.24@14.629,5.216 U11.25 U11.26@11.049,7.366 U11.27 U11.28 U11.29@11.049,11.176 U11.30@11.049,12.446 U11.31@11.049,13.716 U11.32@11.049,14.986 U11.33@11.049,16.256 U11.34@13.359,29.116 U11.35@14.629,29.116 U11.36@22.249,29.116 U11.37@23.519,29.116 U11.38@24.789,29.116 U11.39@26.059,29.116 U11.40@27.329,29.116 U11.41@28.599,29.116 U11.42@29.869,29.116 U11.43@31.139,29.116 U11.44 U11.45@38.759,29.116 U11.46 U11.47@41.299,29.116 U11.48 U13.11 U13.12
copper on no net:
  other v4: 56.642,26.924

## Polygon pours and split planes (outlines as drawn)
AGND on Top Layer "AGND_L01_P003" (solid, pour order 3): 34.59,29.411 43.353,29.411 43.353,26.109 36.742,26.123 36.742,26.109 34.581,26.109
PGND2 on Top Layer "PGND2_L01_P002" (solid, pour order 2): 34.417,9.398 43.18,9.398 43.18,1.778 43.173,1.771 34.396,1.771
PGND1 on Top Layer "p" (solid, pour order 0): 46.399,21.248 48.304,21.248 49.447,20.105 52.241,20.105 52.241,27.344 46.399,27.344

## Other copper
Top Layer:
  rectangle net PGND1: 46.399,25.439 49.066,27.344
  region net AGND: 38.956,28.582 38.875,27.372 38.868,27.379 38.4,27.379 38.4,27.418 37.525,28.292 36.773,28.292 36.702,28.364 36.702,28.983 37.13,29.411 39.785,29.411 40.187,29.813 40.839,29.813 40.839,29.154 40.7,29.016 40.681,29.035 38.956,29.016
  region net VSYS: 37.338,12.05 37.338,11.901 37.489,11.75 37.489,11.068 37.638,10.918 37.638,10.499 37.04,10.499 37.04,10.927 37.188,11.075 37.188,12.058
  region net VSYS: 38.013,12.2 38.138,12.075 38.598,12.075 38.772,11.901 39.693,11.901 39.693,12.279 39.474,12.498 38.754,12.498 38.581,12.325 38.208,12.325
  region net VSENS_1: 37.338,13.35 37.338,13.499 37.187,13.65 37.187,14.332 36.989,14.531 36.989,14.901 37.66,14.901 37.687,14.875 37.687,14.524 37.488,14.325 37.488,13.342
  region net VSENS_2: 36.663,13.2 36.538,13.325 36.078,13.325 35.854,13.549 34.983,13.549 34.983,13.121 35.254,12.85 35.87,12.85 36.095,13.075 36.468,13.075
  region net PGND2: 36.068,9.398 37.719,9.398 37.891,9.226 37.891,8.091 35.965,8.091 35.96,8.096
  region net VSAT: 37.392,5.503 37.392,5.604 37.12,5.604 36.845,5.879 36.109,5.879 36.109,5.403 36.228,5.283 36.995,5.283 37.104,5.403 37.132,5.403 37.396,5.403
  region net VBAT: 37.695,5.11 37.695,4.285 37.975,4.005 37.975,2.734 38.513,2.734 38.671,2.576 38.738,2.642 39.738,2.642 39.738,3.507 38.877,4.368 38.472,4.368 37.888,4.951 37.888,5.106
  region net NetL5_2: 37.792,5.503 37.792,5.402 38.121,5.402 38.508,5.015 39.692,5.015 39.692,5.993 39.69,5.994 38.501,5.994 38.112,5.605 37.791,5.605
  region net LX2: 50.178,23.836 50.685,24.344 51.353,24.344 51.53,24.167 51.528,23.855 51.165,23.678 50.398,23.678 50.178,23.678
  region net LX1: 50.177,22.632 50.59,22.219 51.352,22.219 51.528,22.395 51.527,22.707 51.279,22.828 50.434,22.828 50.397,22.791 50.177,22.791
  region net VSYS: 49.911,23.4 49.911,23.801 49.911,24.205 50.204,24.497 50.204,25.425 49.496,25.425 49.455,25.385 49.455,24.501 49.746,24.211 49.746,23.4
  region net VBAT: 49.747,22.71 49.745,22.707 49.745,22.258 49.454,21.967 49.454,21.039 50.162,21.039 50.202,21.08 50.202,21.963 49.912,22.254 49.912,22.705
  region net NetC2_2: 47.498,13.589 47.036,14.051 46.261,14.051 46.261,14.638 46.396,14.773 47.223,14.773 47.631,14.365 47.631,13.709
  region net NetC58_1: 45.974,11.288 45.976,11.289 46.377,11.289 47.203,12.115 47.575,12.115 47.575,11.262 47.198,10.885 46.095,10.885 45.904,11.076
  region net VBUS: 57.513,13.775 57.235,14.053 57.235,14.348 57.298,14.348 57.472,14.522 57.474,14.52 57.697,14.52 57.823,14.394 57.823,14.075 57.694,13.946 57.694,13.768
  region net VBUS: 58.557,18.661 58.312,18.661 58.166,18.506 58.142,18.393 58.144,18.393 58.241,18.268 58.453,18.167 58.537,18.163
  region net RX-OUT: 58.805,12.496 58.802,12.493 56.062,12.493 55.672,12.102 54.703,12.102 54.703,12.182 55.314,12.793 56.803,12.793 56.905,12.691 58.809,12.691 58.801,12.682 58.801,12.592
  region net COIL-2: 58.803,11.704 58.799,11.88 58.822,11.903 59.548,11.903 60.014,11.436 60.014,7.753 58.934,6.674 58.617,6.991 58.617,7.118 59.379,7.88 59.379,11.182 59.291,11.448 59.071,11.668
  region net NetC5_2: 57.599,11.698 57.603,11.874 57.58,11.896 56.854,11.896 56.388,11.43 56.388,7.747 57.468,6.667 57.785,6.985 57.785,7.112 57.023,7.874 57.023,11.176 57.111,11.442 57.331,11.662
  region net PGND3: 57.705,11.441 58.891,11.441 58.891,10.068 58.459,9.636 57.951,9.636 57.51,10.076 57.51,11.364
Bottom Layer:
  region net GND: 47.498,27.178 48.895,27.178 48.895,25.908 47.498,25.908

## Silkscreen, mask and mechanical layers (free items; w line width, h text height)
Top Overlay:
  lines w0.15: 51.962,34.476 51.962,30.084 69.962,30.084 69.962,34.383
  lines w0.254: 4.58,5.91 29.58,5.91 29.58,30.91 4.58,30.91 4.58,5.91
Bottom Overlay:
  lines w0.15: 51.96,34.486 51.96,30.094 69.96,30.094 69.96,34.393
Mechanical 8:
  lines w0.254: 4.826,-0.762 40.326,-0.762 40.326,34.738 4.826,34.738 4.826,-0.762
Mechanical 12:
  lines w0.1: 0,3.301 0,3.126 ccw(c3.15,3.151) 3.125,0 66.875,0 ccw(c66.85,3.15) 70,3.125 70,6.425 70,31.875 ccw(c66.85,31.85) 66.875,35.001 ; 0,3.302 0,31.875 cw(c3.15,31.85) 3.125,35.001 ; 3.125,35 66.875,35

## Text inside footprints (layer, text, board x,y; h text height)
J13: Mechanical 10 "Edge of PCB" at -0.789,11.764 h0.8 r270
U11: Mechanical 3 "BOTTOM NO MAN'S LAND / SOLDER RESIST AREA / AVOID ROUTING ACTIVE LINES UNDER THIS AREA" at 45.148,24.316 h0.8